# Altium PCB Плата печатная2.PcbDoc
Units mm, origin at the board's own origin, x right, y up, seen from the top; angles counter-clockwise.
Board outline 54.36 x 54.36 mm, 2 copper layers (Top Layer, Bottom Layer), stack 1.27 mm thick; 26 components, 22 nets, 94 pads, 31 vias.
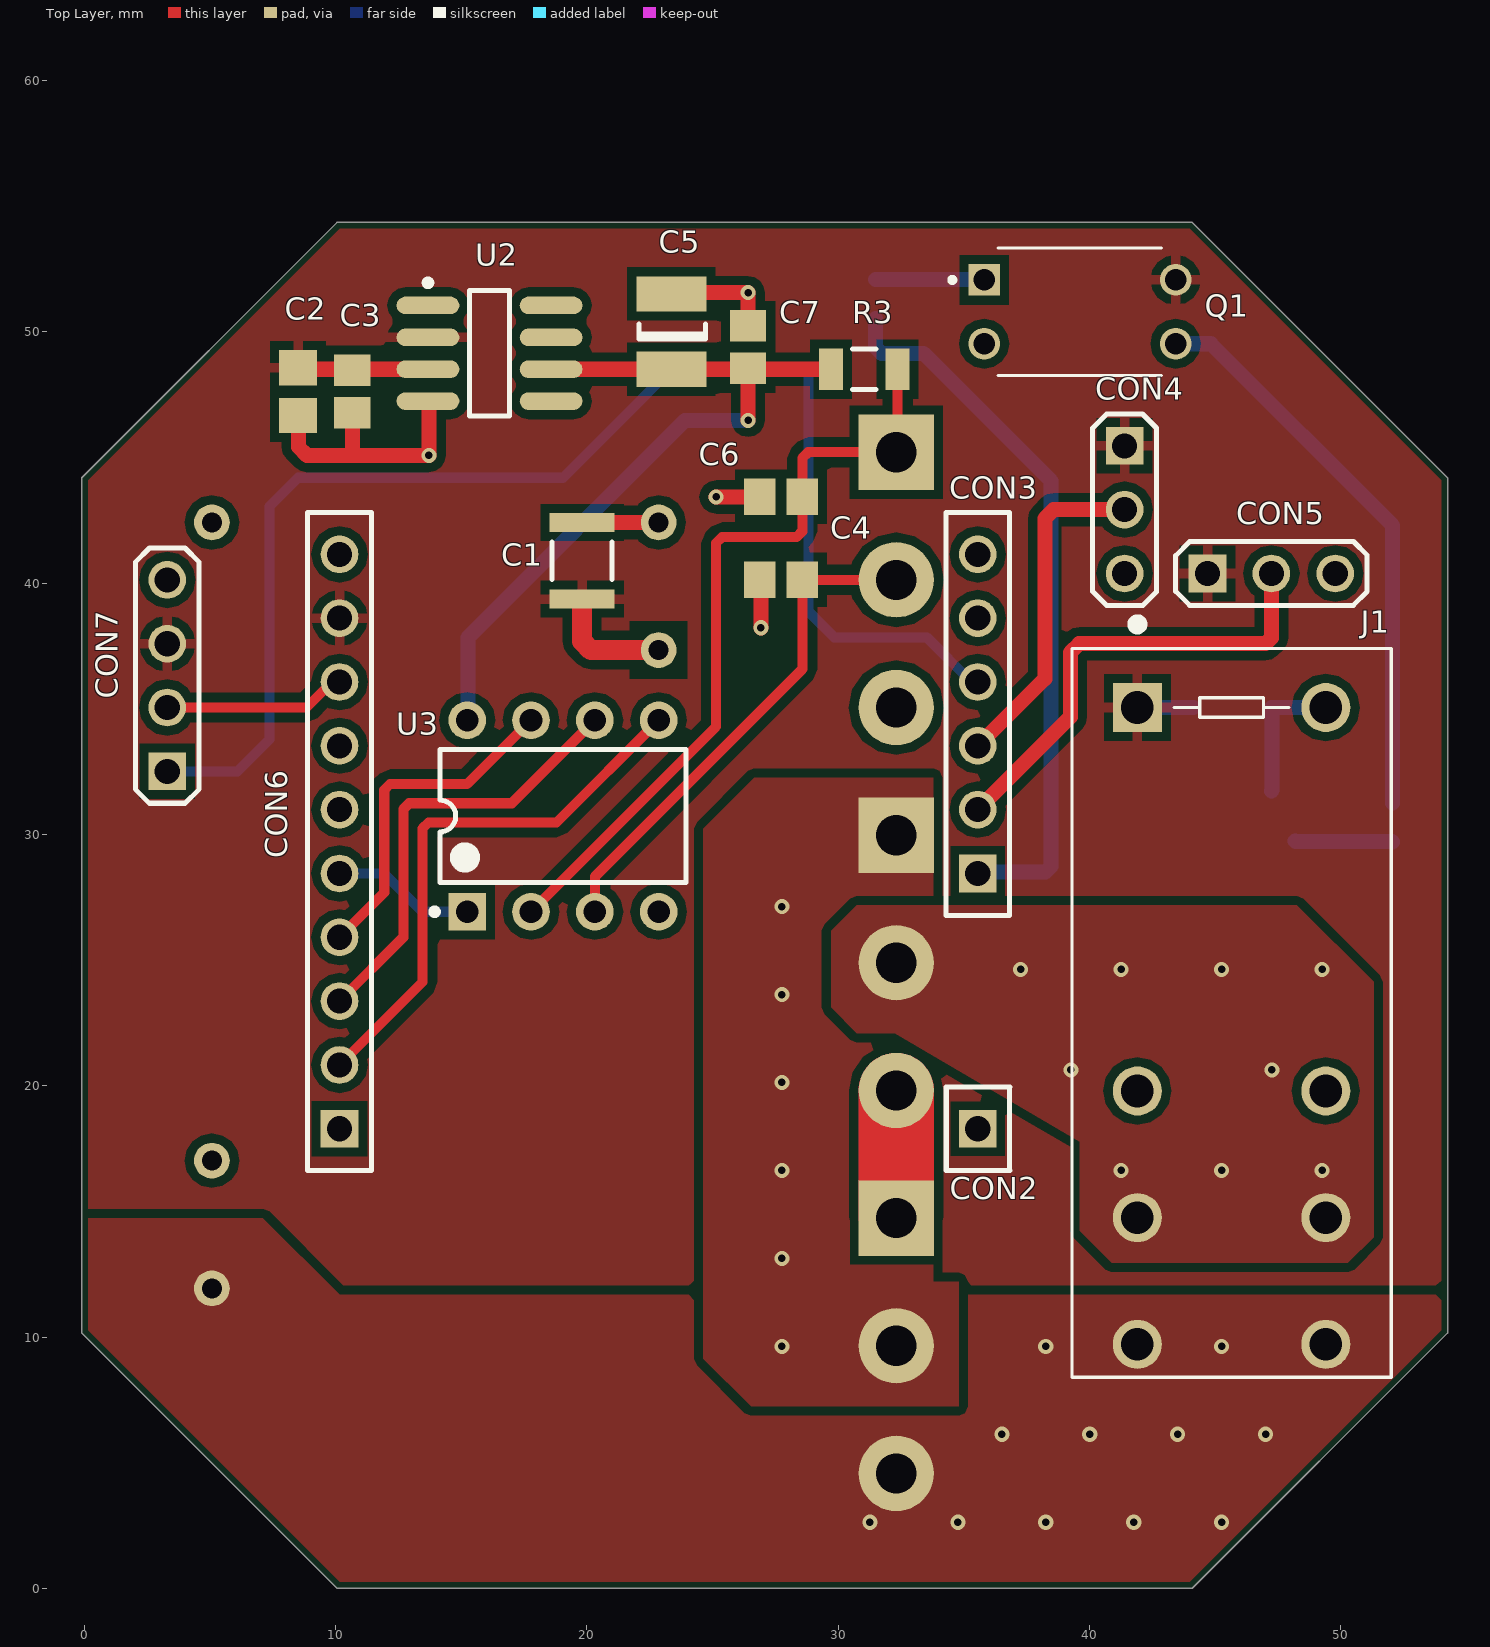
[diagram p0: Top Layer view]
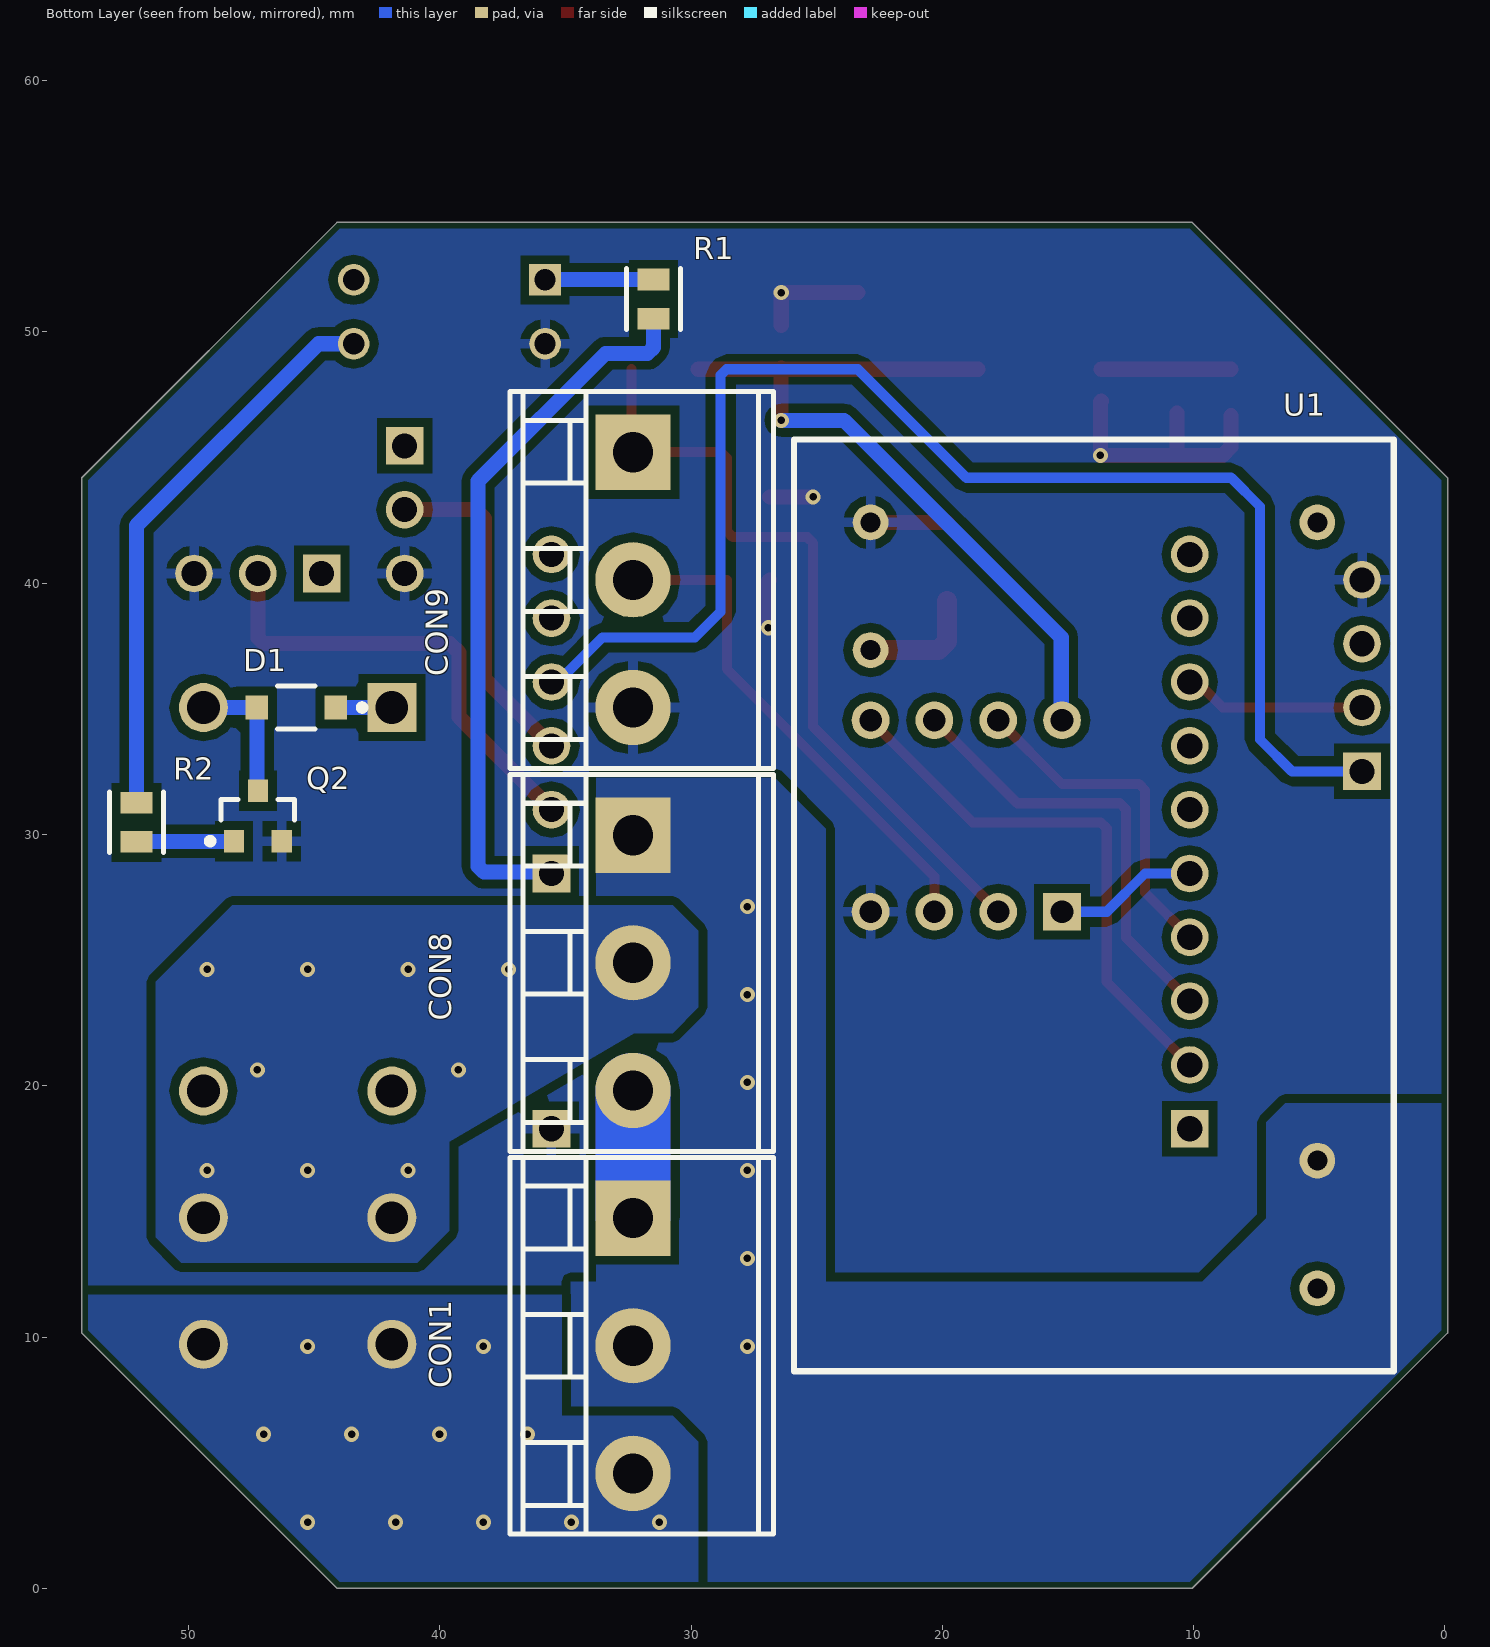
[diagram p1: Bottom Layer view, seen from below]
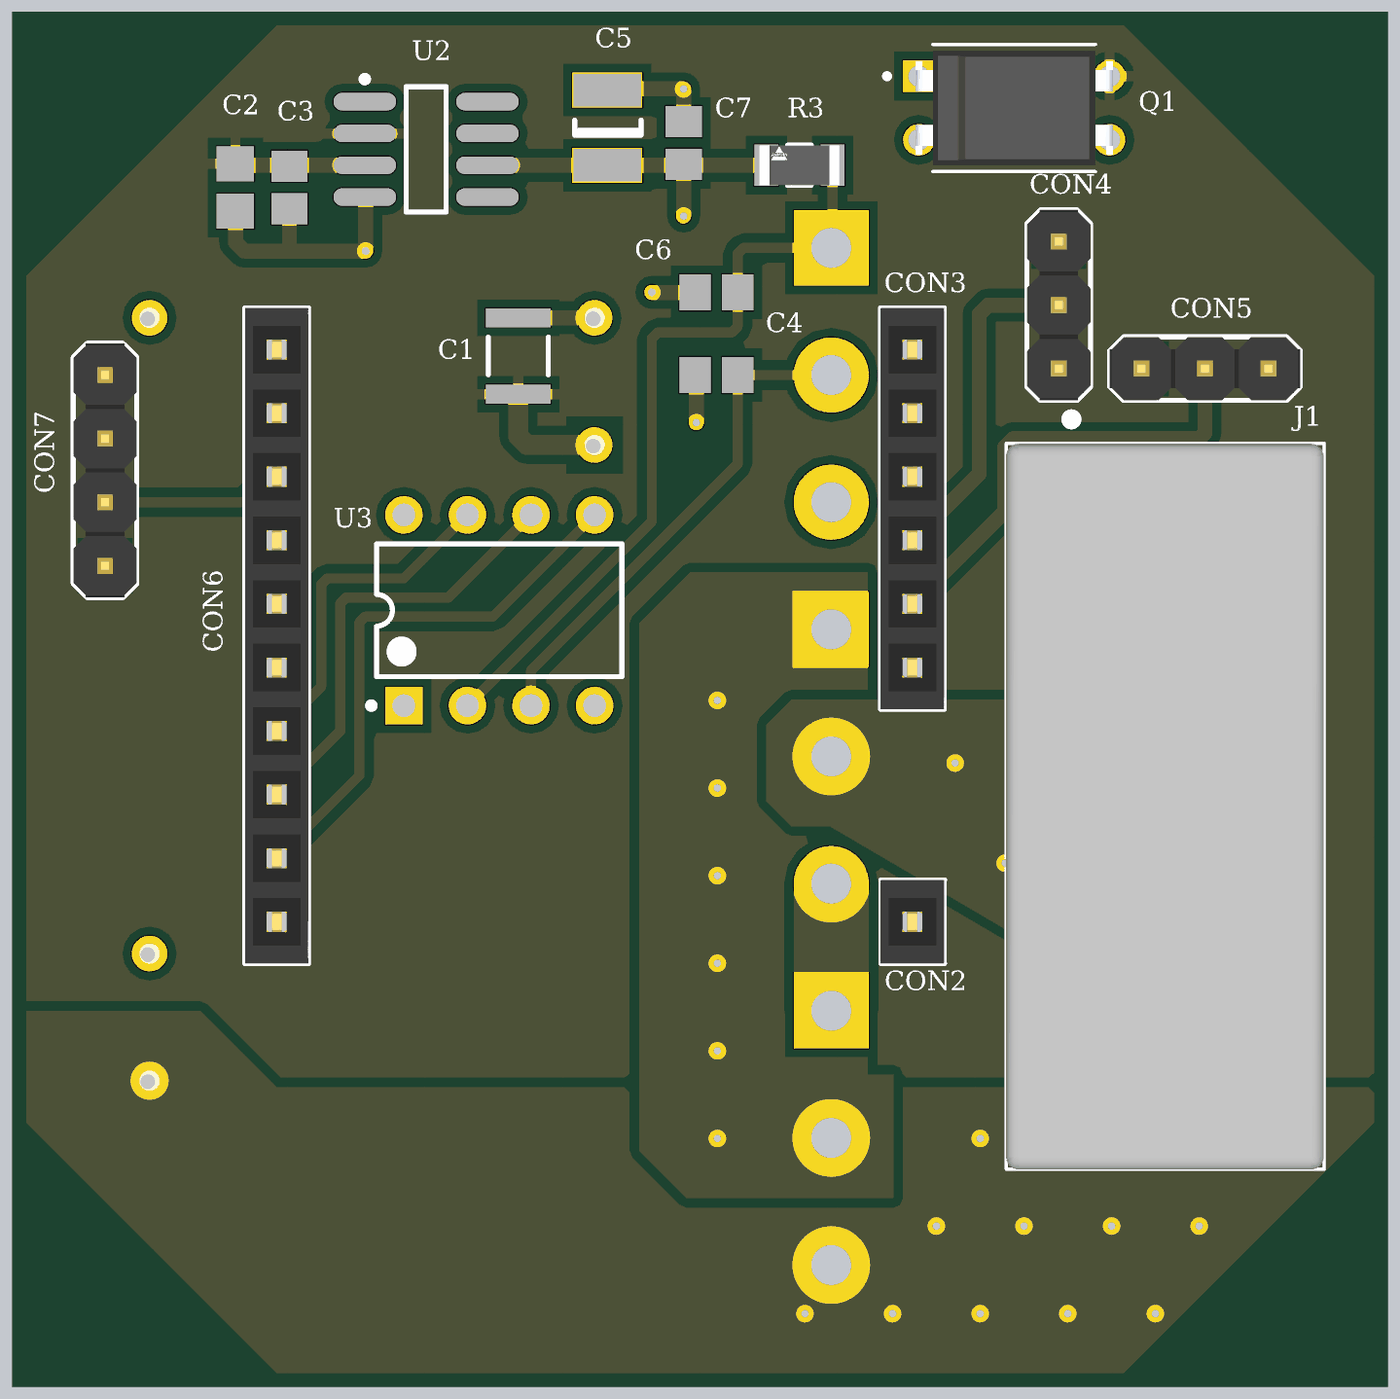
[diagram p2: 3D render of the assembled board from above, using the file's embedded part models]
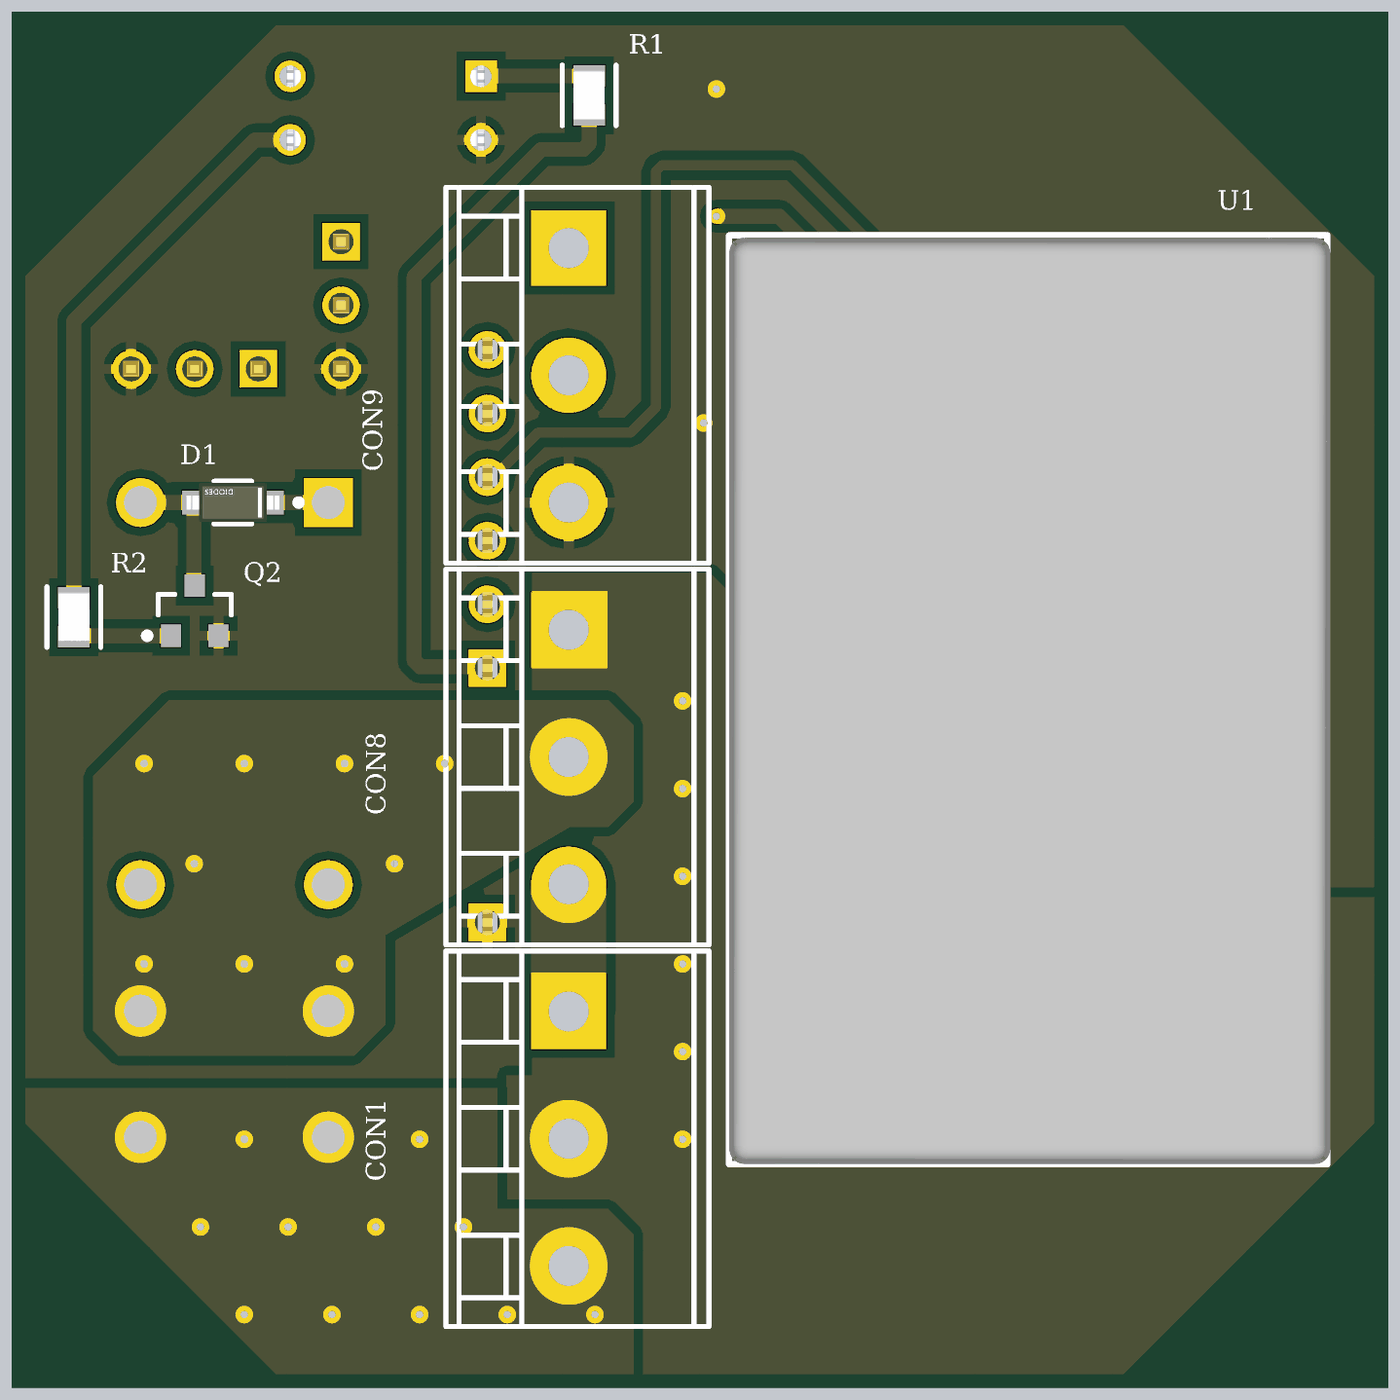
[diagram p3: 3D render of the assembled board from below, using the file's embedded part models]

## Layer stack, top to bottom
Top Solder: solder mask 0.0254, SM-001, Dk 4
Top Layer: signal copper 0.035
Dielectric 1: core 1.2, FR4, Dk 4.6
Bottom Layer: signal copper 0.035
Bottom Solder: solder mask 0.0254, SM-001, Dk 4

## Board outline
-0.102,10.16 -0.102,44.196 10.058,54.356 44.094,54.356 54.254,44.196 54.254,10.16 44.094,0 10.058,0

## Design rules (kind name [scope] priority, off if disabled: settings)
AcuteAngle [All] p1: minimum=3.50000000000000E+0001 checktracksonly=FALSE
BoardOutlineClearance "BoardOutlineClearance 1" [All] p1: gap=0.25 ignorepadtopadclearanceinfootprint=FALSE except(0: Arc-SplitContinuation Track-SplitContinuation SMDPad-SplitContinuation THPad-SplitContinuation Via-SplitContinuation Fill-SplitContinuation Poly-SplitContinuation Region-SplitContinuation Text-SplitContinuation) // Milling
BoardOutlineClearance "BoardOutlineClearance 2" [All] p2: gap=0.4 ignorepadtopadclearanceinfootprint=FALSE except(0: Arc-SplitContinuation Track-SplitContinuation SMDPad-SplitContinuation THPad-SplitContinuation Via-SplitContinuation Fill-SplitContinuation Poly-SplitContinuation Region-SplitContinuation Text-SplitContinuation) // V-Cut
Clearance "Clearance 3 Oz" [All] p1: gap=0.35 ignorepadtopadclearanceinfootprint=FALSE except(0.25: Arc-Hole Track-Hole SMDPad-Hole THPad-Hole Via-Hole Fill-Hole Poly-Hole Region-Hole Text-Hole)
Clearance "Clearance 2 Oz" [All] p2: gap=0.3 ignorepadtopadclearanceinfootprint=FALSE except(0.25: Arc-Hole Track-Hole SMDPad-Hole THPad-Hole Via-Hole Fill-Hole Poly-Hole Region-Hole Text-Hole)
Clearance "Clearance-1 1 Oz" [All] p3: gap=0.2 ignorepadtopadclearanceinfootprint=FALSE except(0.25: Arc-Hole Track-Hole SMDPad-Hole THPad-Hole Via-Hole Fill-Hole Poly-Hole Region-Hole Text-Hole) // Standart
Clearance "Clearance-2 1 Oz" [All] p4: gap=0.15 ignorepadtopadclearanceinfootprint=FALSE except(0.2: Arc-Fill Arc-Poly Track-Fill Track-Poly SMDPad-Fill SMDPad-Poly THPad-Fill THPad-Poly Via-Fill Via-Poly Fill-Fill Fill-Poly Poly-Poly; 0.25: Arc-Hole Track-Hole SMDPad-Hole THPad-Hole Via-Hole Fill-Hole Poly-Hole Region-Hole Text-Hole) // Advance
Clearance "Clearance-1 1/2 Oz" [All] p5: gap=0.125 ignorepadtopadclearanceinfootprint=FALSE except(0.2: Arc-Fill Arc-Poly Track-Fill Track-Poly SMDPad-SMDPad SMDPad-Fill SMDPad-Poly THPad-Fill THPad-Poly Via-Fill Via-Poly Fill-Fill Fill-Poly Poly-Poly Poly-Region Poly-Text; 0.25: Arc-Hole Track-Hole SMDPad-Hole THPad-Hole Via-Hole Fill-Hole Poly-Hole Region-Hole Text-Hole) // Standart
Clearance "Clearance-2 1/2 Oz" [All] p6: gap=0.1 ignorepadtopadclearanceinfootprint=FALSE except(0.15: Arc-Fill Arc-Poly Track-Fill Track-Poly SMDPad-SMDPad SMDPad-Fill SMDPad-Poly THPad-Fill THPad-Poly Via-Fill Via-Poly Fill-Fill Fill-Poly Poly-Poly Poly-Region Poly-Text; 0.25: Arc-Hole Track-Hole SMDPad-Hole THPad-Hole Via-Hole Fill-Hole Poly-Hole Region-Hole Text-Hole) // Advance
DiffPairsRouting "DiffPairsRouting 1 Oz" [All] p1: maxlimit=0.254 minlimit=0.2 mostfreqgap=0.254 toplayer_minwidth=0.2 toplayer_maxwidth=0.381 toplayer_prefwidth=0.381 bottomlayer_minwidth=0.2 bottomlayer_maxwidth=0.381 bottomlayer_prefwidth=0.381 maxuncoupledlength=12.7
DiffPairsRouting "DiffPairsRouting 1/2 Oz" [All] p2: maxlimit=0.254 minlimit=0.1 mostfreqgap=0.254 toplayer_minwidth=0.1 toplayer_maxwidth=0.381 toplayer_prefwidth=0.381 bottomlayer_minwidth=0.1 bottomlayer_maxwidth=0.381 bottomlayer_prefwidth=0.381 maxuncoupledlength=12.7
HoleSize "Minimum HoleSize" [IsPad] p1: absolutevalues=TRUE maxlimit=5.9 minlimit=0.6 maxpercent=80.000 minpercent=20.000
HoleSize "Minimum HoleSize VIA 1" [IsVia] p2: absolutevalues=TRUE maxlimit=5.9 minlimit=0.3 maxpercent=80.000 minpercent=20.000 // Standart
HoleSize "Minimum HoleSize VIA 2" [IsVia] p3: absolutevalues=TRUE maxlimit=5.9 minlimit=0.2 maxpercent=80.000 minpercent=20.000 // Advance
HoleToHoleClearance Hole2HoleClearance [All] p1: gap=0.25 allowstackedmicrovias=FALSE
MinimumAnnularRing "Minimum AR VIA Standart" [IsVia] p1: minimumring=0.15
MinimumAnnularRing "Minimum AR PAD Standart" [IsPAD] p2: minimumring=0.2
MinimumAnnularRing "Minimum AR VIA Advance" [IsVia] p3: minimumring=0.1
MinimumAnnularRing "Minimum AR PAD Advance" [IsPAD] p4: minimumring=0.15
MinimumSolderMaskSliver "SolderMask Bridge Standart" [All] p1: minsoldermaskwidth=0.15 // All Masks
MinimumSolderMaskSliver "SolderMask Bridge Advance" [All] p2: minsoldermaskwidth=0.1 // Mask LDI
PlaneClearance "PlaneClearance 3 Oz" [All] p1: clearance=0.35
PlaneClearance "PlaneClearance 2 Oz" [All] p2: clearance=0.3
PlaneClearance "PlaneClearance 1 Oz" [All] p3: clearance=0.2
PlaneClearance "PlaneClearance-1 1/2 Oz" [All] p4: clearance=0.2 // Standart
PlaneClearance "PlaneClearance-2 1/2 Oz" [All] p5: clearance=0.15 // Advance
PlaneConnect "TermalConnect 3 Oz" [All] p1: planeconnectstyle=Relief reliefexpansion=0.2 reliefentries=4 reliefconductorwidth=0.35 reliefairgap=0.35 // Standart
PlaneConnect "TermalConnect 2 Oz" [All] p2: planeconnectstyle=Relief reliefexpansion=0.2 reliefentries=4 reliefconductorwidth=0.3 reliefairgap=0.3 // Standart
PlaneConnect "TermalConnect-1 1 Oz" [All] p3: planeconnectstyle=Relief reliefexpansion=0.2 reliefentries=4 reliefconductorwidth=0.2 reliefairgap=0.2 // Standart
PlaneConnect "TermalConnect-2 1 Oz" [All] p4: pad.planeconnectstyle=Relief pad.reliefexpansion=0.15 pad.reliefentries=4 pad.reliefconductorwidth=0.2 pad.reliefairgap=0.2 via.planeconnectstyle=Direct via.reliefexpansion=0.15 via.reliefentries=4 via.reliefconductorwidth=0.15 via.reliefairgap=0.15 // Advance
PlaneConnect "TermalConnect-1 1/2 Oz" [All] p5: planeconnectstyle=Relief reliefexpansion=0.2 reliefentries=4 reliefconductorwidth=0.2 reliefairgap=0.2 // Standart
PlaneConnect "TermalConnect-2 1/2 Oz" [All] p6: pad.planeconnectstyle=Relief pad.reliefexpansion=0.15 pad.reliefentries=4 pad.reliefconductorwidth=0.15 pad.reliefairgap=0.15 via.planeconnectstyle=Direct via.reliefexpansion=0.15 via.reliefentries=4 via.reliefconductorwidth=0.15 via.reliefairgap=0.15 // Advance
PolygonConnect Full_contact [InNet('220V(L)','220V(N)','NetCON8_2') vs InNet('220V(L)','220V(N)','NetCON8_2')] p1: connectstyle=Direct reliefconductorwidth=0.5 reliefentries=4 polygonreliefangle="90 Angle" airgapwidth=0
PolygonConnect "PolygonConnect 3 Oz" [All] p2: thpad.connectstyle=Relief thpad.reliefconductorwidth=0.4 thpad.reliefentries=4 thpad.polygonreliefangle="90 Angle" thpad.airgapwidth=0.35 smdpad.connectstyle=Relief smdpad.reliefconductorwidth=0.4 smdpad.reliefentries=4 smdpad.polygonreliefangle="90 Angle" smdpad.airgapwidth=0.35 via.connectstyle=Direct via.reliefconductorwidth=0.254 via.reliefentries=4 via.polygonreliefangle="90 Angle" via.airgapwidth=0.254
PolygonConnect "PolygonConnect 2 Oz" [All] p3: thpad.connectstyle=Relief thpad.reliefconductorwidth=0.3 thpad.reliefentries=4 thpad.polygonreliefangle="90 Angle" thpad.airgapwidth=0.3 smdpad.connectstyle=Relief smdpad.reliefconductorwidth=0.3 smdpad.reliefentries=4 smdpad.polygonreliefangle="90 Angle" smdpad.airgapwidth=0.3 via.connectstyle=Direct via.reliefconductorwidth=0.254 via.reliefentries=4 via.polygonreliefangle="90 Angle" via.airgapwidth=0.254
PolygonConnect "PolygonConnect-1 1 Oz" [All] p4: thpad.connectstyle=Relief thpad.reliefconductorwidth=0.2 thpad.reliefentries=4 thpad.polygonreliefangle="90 Angle" thpad.airgapwidth=0.2 smdpad.connectstyle=Relief smdpad.reliefconductorwidth=0.2 smdpad.reliefentries=4 smdpad.polygonreliefangle="90 Angle" smdpad.airgapwidth=0.2 via.connectstyle=Direct via.reliefconductorwidth=0.254 via.reliefentries=4 via.polygonreliefangle="90 Angle" via.airgapwidth=0.254 // Standart
PolygonConnect "PolygonConnect-2 1 Oz" [All] p5: thpad.connectstyle=Relief thpad.reliefconductorwidth=0.15 thpad.reliefentries=4 thpad.polygonreliefangle="90 Angle" thpad.airgapwidth=0.15 smdpad.connectstyle=Relief smdpad.reliefconductorwidth=0.15 smdpad.reliefentries=4 smdpad.polygonreliefangle="90 Angle" smdpad.airgapwidth=0.15 via.connectstyle=Direct via.reliefconductorwidth=0.254 via.reliefentries=4 via.polygonreliefangle="90 Angle" via.airgapwidth=0.254 // Advance
PolygonConnect "PolygonConnect-1 1/2 Oz" [All] p6: thpad.connectstyle=Relief thpad.reliefconductorwidth=0.15 thpad.reliefentries=4 thpad.polygonreliefangle="90 Angle" thpad.airgapwidth=0.2 smdpad.connectstyle=Relief smdpad.reliefconductorwidth=0.2 smdpad.reliefentries=4 smdpad.polygonreliefangle="90 Angle" smdpad.airgapwidth=0.2 via.connectstyle=Direct via.reliefconductorwidth=0.254 via.reliefentries=4 via.polygonreliefangle="90 Angle" via.airgapwidth=0.254 // Standart
PolygonConnect "PolygonConnect-2 1/2 Oz" [All] p7: thpad.connectstyle=Relief thpad.reliefconductorwidth=0.125 thpad.reliefentries=4 thpad.polygonreliefangle="90 Angle" thpad.airgapwidth=0.15 smdpad.connectstyle=Relief smdpad.reliefconductorwidth=0.125 smdpad.reliefentries=4 smdpad.polygonreliefangle="90 Angle" smdpad.airgapwidth=0.15 via.connectstyle=Direct via.reliefconductorwidth=0.254 via.reliefentries=4 via.polygonreliefangle="90 Angle" via.airgapwidth=0.254 // Advance
RoutingCorners [All] p1 off: cornerstyle=45-Degree minsetback=2.54 maxsetback=2.54
RoutingVias [All] p1: holewidth=0.3 width=0.6 viastyle="Through Hole" minholewidth=0.2 minwidth=0.4 maxholewidth=5.9 maxwidth=6.4
SilkToSilkClearance Silk2SilkClearance [All] p1 off: silktosilkclearance=0.15
SilkToSolderMaskClearance Silk2SolderMaskClearance [IsPad] p1 off: minsilkscreentomaskgap=0.15 clearancetoexposedcopper=TRUE
SolderMaskExpansion SolderMaskExpansion-1 [All] p1: expansion=0.05 istentingtop=FALSE // Standart
SolderMaskExpansion "SolderMaskExpansion LDI" [All] p2: expansion=0.025 istentingtop=FALSE // Advance
UnRoutedNet [All] p1: checkbadconnections=TRUE
Width "Width 3 Oz" [All] p1: maxlimit=10 minlimit=0.35 preferedwidth=0.4 checkconnectedcopper=TRUE
Width "Width 2 Oz" [All] p2: maxlimit=10 minlimit=0.3 preferedwidth=0.35 minimp=50.000000 maximp=50.000000 favimp=50.000000 checkconnectedcopper=TRUE
Width "Width 1 Oz" [All] p3: maxlimit=10 minlimit=0.15 preferedwidth=0.2 checkconnectedcopper=TRUE
Width "Width 1/2 Oz" [All] p4: maxlimit=10 minlimit=0.1 preferedwidth=0.125 checkconnectedcopper=TRUE
20 further rules are at their usual default settings.

## Components (designator, comment, footprint, x,y, rotation, side; value= is the part's Value field where it differs from the comment)
C1 "47uF" MURA-1210_H_2.7_L 19.812,40.894 r270 top
C2 "10uF" CAPC2013X135X45ML10T25 8.509,47.625 r90 top
C3 "0.1uF" CAPC2013X140X45NL15T25 10.668,47.625 r90 top
C4 "0.1uF" CAPC2013X140X45NL15T25 27.725,40.132 r180 top
C5 "1uF" TANTAL_B 23.368,50.014 r270 top
C6 "0.1uF" CAPC2013X140X45NL15T25 27.725,43.434 r180 top
C7 "0.1uF" CAPC2013X140X45NL15T25 26.416,49.403 r270 top
CON1 "DG128-3" DG129-5.08-3 32.314,9.652 r270 bottom
CON2 "PBS-01" PBS-01 35.56,18.288 r90 top
CON3 "PBS-06" PBS-06 35.56,34.798 r90 top
CON4 "PLS-03" PLS-03#1 41.402,42.926 r270 top
CON5 "PLS-03" PLS-03#2 47.244,40.386 r0 top
CON6 "PBS-10" PBS-10 10.16,29.718 r90 top
CON7 "PLS-04" PLS-04 3.302,36.322 r90 top
CON8 "DG128-3" DG129-5.08-3 32.314,24.892 r270 bottom
CON9 "DG128-3" DG129-5.08-3 32.314,40.132 r270 bottom
D1 "1N4148W-13-F" FP-SOD123-MFG 45.72,35.052 r0 bottom value=2pF
J1 "9-1393239-1" RELAY_9-1393239-1 41.91,35.052 r270 top
Q1 "PC817C" DIP762W50P254L650H458Q4B 39.624,50.8 r0 top
Q2 "MMBT2222ALT3G" ONSC-SOT-23-3-318-08_V 47.244,30.734 r90 bottom
R1 "150" FP-CR0805-IPC_C 31.496,51.308 r90 bottom
R2 "300" FP-CR0805-IPC_C 52.07,30.48 r270 bottom
R3 "10k" FP-CRCW1206-e3-IPC_C 31.044,48.514 r180 top
U1 "IRM-03-5" footprint_IRM-03-5 5.08,11.938 r90 bottom
U2 "REF198GSZ" ADI-R-8_M 16.129,49.149 r0 top
U3 "MCP3202-BI/P" PDIP300-P8 19.05,30.734 r90 top

## Footprints (in the part's own frame and the unit in brackets; to place one, negate y for a bottom-side part, rotate by r counter-clockwise, add the part's x,y. Pads: shape width x height; smd on the part's side, far side on the other; paste and mask are expansions set on the pad)
ADI-R-8_M [mm] "SOIC, 8-Leads, Body 4.9x3.9mm, Pitch 1.27mm, IPC Low Density"
  oval 2.5x0.7 smd: 1(-2.45,1.905) 2(-2.45,0.635) 3(-2.45,-0.635) 4(-2.45,-1.905) 5(2.45,-1.905) 6(2.45,-0.635) 7(2.45,0.635) 8(2.45,1.905)
  silkscreen extent -2.57,-2.5 0.8,2.93, body extent -2,-2.5 2,2.5, height 1.75
CAPC2013X135X45ML10T25 [mm] "Chip Capacitor, 2-Leads, Body 2.10x1.35mm, IPC Low Density"
  rect 1.4x1.5 smd: 1(-0.95,0) 2(0.95,0)
  body extent -1.05,-0.67 1.05,0.67, height 1.35
CAPC2013X140X45NL15T25 [mm] "Chip Capacitor, 2-Leads, Body 2.00x1.25mm, IPC Medium Density"
  rect 1.25x1.45 smd: 1(-0.85,0) 2(0.85,0)
  body extent -1.08,-0.7 1.07,0.7, height 1.4
DG129-5.08-3 [mm]
  rect 3x3 hole 1.6 paste-0.05: 1(-5.08,0)
  round 3 hole 1.6 paste-0.05: 2(0,0) 3(5.08,0)
  silkscreen extent -7.5,-4.9 7.5,5.6, body extent -8.15,-5.33 7.69,6.03, height 18
DIP762W50P254L650H458Q4B [mm]
  rect 1.26x1.26 hole 0.85: 1(-3.81,1.27)
  round 1.26 hole 0.85: 2(-3.81,-1.27) 3(3.81,-1.27) 4(3.81,1.27)
  silkscreen extent -5.18,-2.54 3.25,2.54, body extent -3.94,-2.29 3.94,2.29, height 4.8
footprint_IRM-03-5 [mil]
  round 56 hole 31.5: +V(1000,700) -V(1200,700) AC/L(0,0) AC/N(200,0) NC(1200,0)
  silkscreen extent -130,-120 1330,820, body extent -130,-125 1327,820, height 591
FP-CR0805-IPC_C [mm]
  rect 0.858x1.262 smd paste+0: 1(-0.777,0) 2(0.777,0)
  silkscreen extent -1.21,-1.07 1.21,1.07, body extent -1,-0.63 1,0.63, height 0.6
FP-CRCW1206-e3-IPC_C [mm]
  rect 0.956x1.658 smd paste+0: 1(-1.326,0) 2(1.326,0)
  silkscreen extent -0.47,-0.8 0.47,0.8, body extent -1.6,-0.8 1.6,0.8, height 0.6
FP-SOD123-MFG [mm]
  rect 0.9x0.95 smd paste+0: 1(-1.575,0) 2(1.575,0)
  silkscreen extent -2.75,-0.85 0.75,0.85, body extent -1.85,-0.77 1.85,0.77, height 1.45
MURA-1210_H_2.7_L [mm] "Chip Capacitor, 2-Leads, Body 3.5x2.7mm, IPC High Density"
  rect 0.75x2.6 smd: 1(-1.525,0) 2(1.525,0)
  silkscreen extent -0.75,-1.2 0.75,1.2, body extent -1.75,-1.35 1.75,1.35, height 2.7
ONSC-SOT-23-3-318-08_V [mm] "SOT23, 3-Leads, Body 2.92x1.3mm, Pitch 0.95mm"
  rect 0.9x0.8 smd: 1(-1,0.95) 2(-1,-0.95) 3(1,0)
  silkscreen extent -1.12,-1.46 0.65,2.03, body extent -0.65,-1.46 0.65,1.46, height 1.11
PBS-01 [mm]
  rect 1.5x1.5 hole 1 paste-0.05: 1(0,0)
  silkscreen extent -1.67,-1.28 1.67,1.26, body extent -1.67,-1.27 1.67,1.27, height 8.5
PBS-06 [mm]
  rect 1.5x1.5 hole 1 paste-0.05: 1(-6.35,0)
  round 1.5 hole 1 paste-0.05: 2(-3.81,0) 3(-1.27,0) 4(1.27,0) 5(3.81,0) 6(6.35,0)
  silkscreen extent -8.02,-1.27 8.02,1.27, body extent -8.02,-1.27 8.02,1.27, height 8.5
PBS-10 [mm]
  rect 1.5x1.5 hole 1 paste-0.05: 1(-11.43,0)
  round 1.5 hole 1 paste-0.05: 2(-8.89,0) 3(-6.35,0) 4(-3.81,0) 5(-1.27,0) 6(1.27,0) 7(3.81,0) 8(6.35,0) 10(11.43,0)
  round 1.5 hole 1: 9(8.89,0)
  silkscreen extent -13.1,-1.27 13.1,1.27, body extent -13.1,-1.27 13.1,1.27, height 8.5
PDIP300-P8 [mm] "8-Pin Plastic Dual In-Line Package (PDIP)"
  rect 1.5x1.5 hole 0.9: 1(-3.81,3.81)
  round 1.5 hole 0.9: 2(-3.81,1.27) 3(-3.81,-1.27) 4(-3.81,-3.81) 5(3.81,-3.81) 6(3.81,-1.27) 7(3.81,1.27) 8(3.81,3.81)
  silkscreen extent -3.93,-4.9 2.65,5.23, body extent -3.55,-4.9 3.55,4.9, height 4.32
PLS-03#1 [mm]
  rect 1.5x1.5 hole 1: 1(-2.54,0)
  round 1.5 hole 1: 2(0,0) 3(2.54,0)
  silkscreen extent -3.81,-1.27 3.81,1.27, body extent -3.81,-1.27 3.81,1.27, height 8.6
PLS-03#2 [mm]
  rect 1.5x1.5 hole 1 paste-0.05: 1(-2.54,0)
  round 1.5 hole 1 paste-0.05: 2(0,0) 3(2.54,0)
  silkscreen extent -3.81,-1.27 3.81,1.27, body extent -3.81,-1.27 3.81,1.27, height 8.6
PLS-04 [mm]
  rect 1.5x1.5 hole 1 paste-0.05: 1(-3.81,0)
  round 1.5 hole 1 paste-0.05: 2(-1.27,0) 3(1.27,0) 4(3.81,0)
  silkscreen extent -5.08,-1.27 5.08,1.27, body extent -5.08,-1.27 5.08,1.27, height 8.6
RELAY_9-1393239-1 [mm]
  round 1.95 hole 1.3: 11(20.3,0) 11-1(20.3,7.5) 12(15.26,0) 12-1(15.26,7.5) 14(25.34,0) 14-1(25.34,7.5) A2(0,7.5)
  rect 1.95x1.95 hole 1.3: A1(0,0)
  silkscreen extent -3.51,-2.6 26.65,10.1, body extent -2.34,-2.62 26.66,10.08, height 15.7
TANTAL_B [mm]
  rect 1.4x2.8 smd paste-0.05: 1(1.5,0) 2(-1.5,0)
  silkscreen extent -0.3,-1.35 0.3,1.35, body extent -1.75,-1.4 1.75,1.4, height 1.9

## Part data
C1: library part CMP-2000-06362-1, "Cap Ceramic, 47 uF, +/- 10%, -55 to 85 degC, 2-Pin SMD (1210), RoHS, Tape and Reel", Capacitance=47µF, Manufacturer=Murata, Operating Temperature=-55°C~85°C, Package / Case=1210(3225Metric), Package Description="2-Pin Surface Mount Device, Body 3.2 x 2.5 mm", Package Reference=1210, Ratings=-, Standard Package=1, Temperature Coefficient=X5R, Tolerance=±10%, Voltage - Rated=16V, Applications=GeneralPurpose, Catalog Drawings=GRMSeries_1210_2.5, Category=Capacitors, Datasheet URL=http://psearch.en.murata.com/capacitor/product/GRM32ER61C476KE15%23.pdf, Datasheet Version=04/2016, Family=CeramicCapacitors, Features=-, Height - Seated (Max)=-, Lead Spacing=-, Lead Style=-, Manufacturer URL=http://www.murata.com/, Mounting Technology=SurfaceMount, Mounting Type=SurfaceMount,MLCC, Online Catalog=GRMSeries, Other Names=490-6539-6, Packaging=Digi-Reel®, Product Training Modules=High-CapMultilayerCeramicCapacitors, Series=GRM, Size / Dimension="0.126\"Lx0.098\"W(3.20mmx2.50mm)", Thickness (Max)="0.106\"(2.70mm)", Voltage Rating DC=16V
C2: library part CMP-2000-04946-1, "GRM21BR61E106KA73L / 10uF, +/- 10%, 25 V, 0805", Capacitance=1µF, Case Size/Dimension=0805, Dielectric=X7R, Manufacturer=Murata, Package Description="2-Pin Surface Mount Device, Body 2 x 1.25 mm", Package Reference=805, Rated Voltage=16V, Tolerance (%)=±10%, Datasheet URL=https://datasheet.ciiva.com/34302/1858922-34302874.pdf, Datasheet Version=Mar-08, Manufacturer URL=http://www.murata.com/
C3 C4 C6 C7: library part CMP-2007-03401-1, "GRM21BR71H104K / 0.1 мкФ X7R 10% 50В 0805", Manufacturer=Murata, Part Number=GRM21BR71C475KA73L
C5: library part _TANTAL-B, "TANTAL TECAP1/50V B, 10%", Lifetime @ Temp=2000Hrs@105℃, Assembly type="Manual Part", Note="Tantalum Capacitors", Publisher="Catcatcat Electronics", website developer=http://catcatcat.d-lan.dp.ua/
CON1 CON8 CON9: library part DG129-5.08-3, Temp.Characteristic="-40C to +85C", Assembly type="Manual Part", Note=Connector, Publisher="Catcatcat Electronics", website developer=http://catcatcat.d-lan.dp.ua/
CON2 CON3 CON6: "2.54mm", Temp.Characteristic="-40C to +85C", Assembly type="Manual Part", Note=Connector, Publisher="Catcatcat Electronics", website developer=http://catcatcat.d-lan.dp.ua/
CON4 CON5 CON7: "2.54 mm", Temp.Characteristic="-40C to +85C", Assembly type="Manual Part", Note=Connector, Publisher="Catcatcat Electronics", website developer=http://catcatcat.d-lan.dp.ua/
D1: library part CMP-12791-000005-1, "DIODE GEN PURP 100V 150MA SOD123", Capacitance=2pF, Forward Current=300mA, Manufacturer="Diodes Inc.", Max Junction Temp=+150°C, Max Repetitive Reverse Voltage=100V, Max Surge Forward Current=1A, Package=SOD123, Peak Reverse Current=1uA, Temperature="-65°C to +150°C", Temperature Range Low=-65°C, Automotive=No, Category=Diode, ComponentLink2Description=Datasheet, ComponentLink2URL=https://upverter.com/datasheet/628e7d6fee5901eee6eef4567d1c3569f2cd3cde.pdf, Device Class L1="Discrete Semiconductors", Device Class L2=Diodes, Device Class L3="Rectifier Diodes", Digikey Description="DIODE GEN PURP 100V 150MA SOD123", Footprint Url=https://www.diodes.com/assets/Package-Files/SOD123.pdf, Height=1.45mm, Lead Free=Yes, Manufacturer Part Number=1N4148W-13-F, Mouser Description="1N4148W Series 2 A 100 V 400 mW Surface Mount Fast Switching Diode - SOD-123", Octopart=https://octopart.com/1n4148w-13-f-diodes+inc.-2359612, Reverse Voltage=100V, RoHS=TRUE, Standoff Height=0mm, Temperature Range High=+150°C
J1: "RELAY GEN PURPOSE SPDT 16A 5V", Package=None, Availability=Unavailable, MF="{'manufacturer': u'TE Connectivity'}", MP=9-1393239-1, Price=None
Q1: "High Density Mounting Type Photocoupler", Package=None, Availability=Unavailable, MF="{'manufacturer': u'Taiwan Semiconductor'}", MP=PC817C, Price=None
Q2: library part CMP-1048-00592-1, "General Purpose Transistor, NPN Silicon, 3-Pin SOT-23, Pb-Free, Tape and Reel", Manufacturer="On Semiconductor", ComponentLink1Description="Manufacturer URL", ComponentLink1URL=http://www.onsemi.com/, ComponentLink2Description=Datasheet, ComponentLink2URL=http://www.onsemi.cn/pub_link/Collateral/MMBT2222LT1-D.PDF, ComponentLink3Description="Package Specification", ComponentLink3URL=http://www.onsemi.cn/pub_link/Collateral/318-08.PDF, DatasheetVersion="Rev. 10", fT Min (MHz)=300, IC Continuous (A)=0.6, Mounting Technology="Surface Mount", PackageDescription="3-Pin Small Outline Transistor, Body 2.92 x 1.3 mm, Pitch 0.95 mm", PackageReference=SOT-23-3-318-08, PackageVersion="Rev. AP, 11/2009", Packing="Tape and Reel", PartNumber=MMBT2222ALT3G, Polarity=NPN, RoHS=TRUE
R1: library part CMP-07231-005922-1, "0805 150Ω 0.125W 1%", Case Code (Imperial)=0805, Case Code (Metric)=2012, Max Operating Temperature=155°C, Max Power Dissipation=125mW, Min Operating Temperature=-55°C, Package Quantity=1, Resistance=300kR, Temperature Coefficient=100ppm/°C, Tolerance=1%, Voltage Rating=150V, Case/Package=0805, Composition="Thick Film", Contact Plating=Tin, Depth=1.25mm, Features="Moisture Resistant", Height=0.024inch, Length=2mm, Military Standard=Not, Mount="Surface Mount", Number of Terminations=2, Packaging="Tape and Reel", Power Rating=125mW, Radiation Hardening=No, Termination=SMD/SMT, Thickness=508um, Width=0.049inch
R2: library part CMP-07231-005922-1, "0805 300kΩ 0.125W 1%", Case Code (Imperial)=0805, Case Code (Metric)=2012, Max Operating Temperature=155°C, Max Power Dissipation=125mW, Min Operating Temperature=-55°C, Package Quantity=1, Resistance=300kR, Temperature Coefficient=100ppm/°C, Tolerance=1%, Voltage Rating=150V, Case/Package=0805, Composition="Thick Film", Contact Plating=Tin, Depth=1.25mm, Features="Moisture Resistant", Height=0.024inch, Length=2mm, Military Standard=Not, Mount="Surface Mount", Number of Terminations=2, Packaging="Tape and Reel", Power Rating=125mW, Radiation Hardening=No, Termination=SMD/SMT, Thickness=508um, Width=0.049inch
R3: library part CMP-2003-04807-2, "10kΩ, 1%, 0.25W 1206", Case Code (Imperial)=1206, Case Code (Metric)=3216, Max Operating Temperature=155°C, Max Power Dissipation=250mW, Min Operating Temperature=-55°C, Package Quantity=10, Resistance=10kR, Temperature Coefficient=100ppm/°C, Tolerance=1%, Voltage Rating=200V, Case/Package=1206, Composition="Thick Film", Contact Plating=Tin, Depth=1.6mm, Features="Automotive AEC-Q200", Height=0.55mm, Lead Free="Lead Free", Length=3.2mm, Military Standard=Not, Number of Pins=2, Number of Terminations=2, Packaging="Tape and Reel", Power Rating=250mW, Radiation Hardening=No, Termination=SMD/SMT, Voltage Rating (DC)=200V, Weight=0.000353oz, Width=0.063inch, Working Voltage=200V
U1: "AC-DC Single output Encapsulated power supply; Output 5Vdc at 0.6A; PCB mount, miniature size", Package=None, Availability=Unavailable, MF="{'manufacturer': u'MEAN WELL'}", MP=IRM-03-5, Price=None
U2: library part CMP-0784-00265-1, "Precision Micropower, Low Dropout Voltage Reference, 4.096 V Output, 3.4 to 15 V Supply, Industrial, 8-pin SOIC (R-8), Tube", Manufacturer="Analog Devices", Operating Temp Range="-40 to 85 degC", Code_JEDEC=MS-012-AA, ComponentLink1Description="Manufacturer URL", ComponentLink1URL=http://www.analog.com/en/index.html, ComponentLink2Description=Datasheet, ComponentLink2URL=http://www.analog.com/static/imported-files/data_sheets/REF19xSeries.pdf, ComponentLink3Description="Package Specification", ComponentLink3URL=http://www.analog.com/static/imported-files/packages/PKG_PDF/SOIC_Narrow%20(R)/R_8.pdf, ComponentLink4Description="URL Link1", ComponentLink4URL="Product URL:http://www.analog.com/en/special-linear-functions/voltage-references/ref198/products/product.html", DatasheetVersion="Rev. L", Mounting Technology="Surface Mount", PackageDescription="8-Pin Standard Small Outline Package, Body 4.9 x 3.9 mm, Pitch 1.27 mm", PackageReference=R-8, PackageVersion="060506-A, 06/2006", Packing=Tube, PartNumber=REF198GSZ, Ref Out TC (ppm/C)=10, Vout=4.096V
U3: library part CMP-0188-00011-2, "2.7V Dual Channel 12-Bit A/D Converter with SPI Serial Interface, 8-Pin PDIP, B Performance Grade, Industrial Temperature", Code_JEDEC=MS-001, ComponentLink1Description="Manufacturer URL", ComponentLink1URL=http://www.microchip.com/, ComponentLink2Description=Datasheet, ComponentLink2URL=http://ww1.microchip.com/downloads/en/DeviceDoc/21034F.pdf, ComponentLink3Description="Package Specification", ComponentLink3URL=http://www.microchip.com/stellent/groups/techpub_sg/documents/packagingspec/en012702.pdf, DatasheetVersion="revF, Nov-2011", PackageDescription="8-Lead Plastic Dual In-Line (P) - 300 mil Body [PDIP]", PackageReference=PDIP300-P8, PackageVersion="revBB, Aug-2009", RevisionNote="URLs added. DatasheetVersion updated."

## Via types
v1: diameter 0.6, hole 0.3, Top Layer to Bottom Layer, 31 vias

## Nets (pads, with @x,y where several pads share a name; then routed paths per layer and width w, separated by ;. In a path a pad name is that pad's centre, name@x,y a point inside that pad or via, vN(x,y) a via of type N, cw(c..) or ccw(c..) an arc to the next point about the centre after c; other vN are vias at no path point)
220V(L): CON1.3 J1.14 J1.14-1 U1.AC/L
  other v1: 31.265,2.63 34.765,2.63 38.265,2.63 41.765,2.63 45.265,2.63 36.515,6.13 40.015,6.13 43.515,6.13 47.015,6.13 38.265,9.63 45.265,9.63
220V(N): CON1.2 CON8.1 U1.AC/N
  other v1: 27.765,9.63 27.765,13.13 27.765,16.63 27.765,20.13 27.765,23.63 27.765,27.13
+4.096V: C5.1 C7.2 R3.2 U2.6 U3.8 | length 31.3
  Top Layer w0.6: U2.6 C5.1 26.377,48.514 C7.2 ; v1(26.416,46.482) 26.418,46.484 26.418,48.551 C7.2 ; R3.2 26.455,48.514 C7.2
  Bottom Layer w0.6: U3.8 15.271,34.575 15.271,37.84 23.914,46.482 v1(26.416,46.482)
+5V: C1.2 C2.2 C3.2 CON4.1 CON5.1 CON6.9 CON7.3 D1.1 J1.A1 Q1.4 U1.+V U2.2 U2.3 | length 12.2
  Top Layer w0.6: C2.2@8.509,48.514 U2.3
  Top Layer w0.8: C1.2@19.812,39.294 19.812,37.689 20.163,37.338 U1.+V
  Bottom Layer w0.6: J1.A1 D1.1
GND_AC: CON1.1 CON8.3 | length 10.2
  Top Layer w0.6: CON1.1@32.258,14.732 CON1.1@32.314,14.788
  Top Layer w3: CON1.1@32.314,14.788 CON8.3
  Bottom Layer w0.6: CON1.1@32.258,14.732 CON1.1@32.314,14.788
  Bottom Layer w3: CON1.1@32.314,14.788 CON8.3
GND_DC: C1.1 C2.1 C3.1 C4.2 C5.2 C6.2 C7.1 CON2.1 CON4.3 CON5.3 CON7.4 CON9.3 Q1.2 Q2.2 U1.-V U2.4 U3.4 | length 21.5
  Top Layer w0.6: C2.1 8.519,46.665 8.519,45.426 8.86,45.085 10.668,45.085 ; C3.1 10.668,45.085 ; U2.4 13.716,47.207 v1(13.716,45.085) 10.668,45.085 ; C1.1 U1.-V ; C5.2@23.368,51.562 v1(26.416,51.562) C7.1 ; v1(25.146,43.434) C6.2 ; C4.2 26.924,40.083 v1(26.924,38.227)
I2C_SCL: CON3.4 CON7.1 | length 55
  Bottom Layer w0.4: CON7.1 6.096,32.512 7.366,33.782 7.366,43.053 8.509,44.196 19.05,44.196 23.368,48.514 28.595,48.514 28.829,48.28 28.829,38.864 29.847,37.846 33.528,37.846 35.306,36.068 CON3.4
I2C_SDA: CON6.8 CON7.2 | length 7.3
  Top Layer w0.4: CON7.2 8.846,35.052 9.862,36.068 CON6.8
NetC4_1: C4.1 CON9.2 U3.3 | length 20.3
  Top Layer w0.4: U3.3 20.32,28.321 28.575,36.576 C4.1 CON9.2@32.258,40.132
NetC6_1: C6.1 CON9.1 R3.1 U3.2 | length 31.4
  Top Layer w0.4: U3.2 25.146,34.29 25.146,41.599 25.38,41.833 28.341,41.833 28.575,42.067 C6.1 28.575,44.978 28.809,45.212 32.258,45.212 32.37,45.324 R3.1
NetCON8_2: CON8.2 J1.11 J1.11-1
  other v1: 41.265,16.63 45.265,16.63 49.265,16.63 39.265,20.63 47.265,20.63 37.265,24.63 41.265,24.63 45.265,24.63 49.265,24.63
NetD1_2: D1.2 J1.A2 Q2.3 | length 5.4
  Bottom Layer w0.6: Q2.3 47.269,31.759 47.269,35.027 D1.2@47.244,35.052 ; D1.2 J1.A2@49.403,35.052
NetQ1_1: Q1.1 R1.2 | length 4.3
  Bottom Layer w0.6: R1.2 35.799,52.085 Q1.1
NetQ1_3: Q1.3 R2.1 | length 22.7
  Bottom Layer w0.6: Q1.3 44.831,49.53 52.07,42.291 R2.1
NetQ2_1: Q2.1 R2.2 | length 3.9
  Bottom Layer w0.6: Q2.1 48.201,29.727 52.047,29.727 R2.2
Relay_ctrl: CON3.1 R1.1 | length 28.7
  Bottom Layer w0.6: R1.1 31.496,49.383 31.73,49.149 33.401,49.149 38.481,44.069 38.481,28.732 38.247,28.498 35.61,28.498 CON3.1
spi1_clk: CON6.4 U3.7 | length 13.6
  Top Layer w0.4: CON6.4 11.938,27.686 11.938,31.77 12.172,32.004 15.24,32.004 U3.7
spi1_cs: CON6.5 U3.1 | length 5.7
  Bottom Layer w0.4: CON6.5 11.938,28.448 13.462,26.924 U3.1
spi1_miso: CON6.3 U3.6 | length 17.8
  Top Layer w0.4: CON6.3 12.7,25.908 12.7,31.008 12.934,31.242 17.018,31.242 U3.6
spi1_mosi: CON6.2 U3.5 | length 22
  Top Layer w0.4: CON6.2 13.462,24.13 13.462,30.246 13.696,30.48 18.796,30.48 U3.5
Touch_1: CON3.3 CON4.2 | length 13.5
  Top Layer w0.6: CON3.3 38.227,36.195 38.227,42.575 38.578,42.926 CON4.2
Touch_2: CON3.2 CON5.2 | length 18.6
  Top Layer w0.6: CON3.2 39.243,34.671 39.243,37.241 39.594,37.592 47.01,37.592 47.244,37.826 CON5.2
pads on no net: CON3.5 CON3.6 CON6.1 CON6.6 CON6.7 CON6.10 J1.12 J1.12-1 U1.NC U2.1 U2.5 U2.7 U2.8

## Polygon pours and split planes (outlines as drawn)
+5V on Top Layer "Top Layer +5V" (solid, remove dead copper, pour order 27): 0,44.196 10.16,54.356 44.196,54.356 54.356,44.196 54.356,10.16 44.196,0 10.16,0 0,10.16
220V(L) on Top Layer "Top Layer 220L" (solid, remove dead copper, pour order 24): 0,10.16 0,14.732 7.112,14.732 10.16,11.684 54.356,11.684 54.356,10.16 44.196,0 10.16,0
220V(N) on Top Layer "Top Layer 220N" (solid, remove dead copper, pour order 22): 24.638,12.192 24.638,30.226 26.67,32.258 33.782,32.258 33.782,12.192 34.798,12.192 34.798,7.239 26.543,7.239 24.638,9.144
NetCON8_2 on Top Layer "Top Layer Relay" (solid, remove dead copper, pour order 20): 29.718,23.114 29.718,26.162 30.734,27.178 48.26,27.178 51.308,24.13 51.308,16.256 51.308,13.97 50.292,12.954 40.894,12.954 39.624,14.224 39.624,15.748 39.624,17.78 32.258,22.098 30.734,22.098
GND_DC on Bottom Layer "Top Layer  GND_DC" (solid, remove dead copper, pour order 26): 0,44.196 10.16,54.356 44.196,54.356 54.356,44.196 54.356,10.16 44.196,0 10.16,0 0,10.16
220V(L) on Bottom Layer "Bottom Layer 220L" (solid, remove dead copper, pour order 23): 54.356,11.684 54.356,10.16 44.196,0 29.718,0 29.718,5.842 30.734,6.858 35.154,6.858 35.154,11.684
NetCON8_2 on Bottom Layer "Bottom Layer Relay" (solid, remove dead copper, pour order 21): 29.718,23.114 29.718,26.162 30.734,27.178 48.26,27.178 51.308,24.13 51.308,16.256 51.308,13.97 50.292,12.954 40.894,12.954 39.624,14.224 39.624,15.748 39.624,17.78 32.258,22.098 30.734,22.098
220V(N) on Bottom Layer "Bottom Layer 220N" (solid, remove dead copper, pour order 25): 0,19.304 6.35,19.304 7.112,18.542 7.112,14.732 9.652,12.192 24.638,12.192 24.638,30.226 26.67,32.258 33.782,32.258 33.782,12.192 34.798,12.192 34.798,0 10.16,0 0.254,9.906 0,9.906

## Other copper
Top Layer:
  pour cut-out: 21.717,38.481 24.003,38.481 24.003,36.195 21.717,36.195
  pour cut-out: 9.207,49.403 15.43,49.403 15.431,47.498 9.208,47.498
  pour cut-out: 9.271,60.833

## Silkscreen, mask and mechanical layers (free items; w line width, h text height)
Board_shape:
  region: 47.244,81.788
  lines w0.6: -0.102,10.16 -0.102,32.512 -0.102,44.196 10.058,54.356 44.094,54.356 54.254,44.196 54.254,10.16 44.094,0 10.058,0 -0.102,10.16